# EAGLE board MainBoard 1.3.3 (EAGLE 9.4.1)
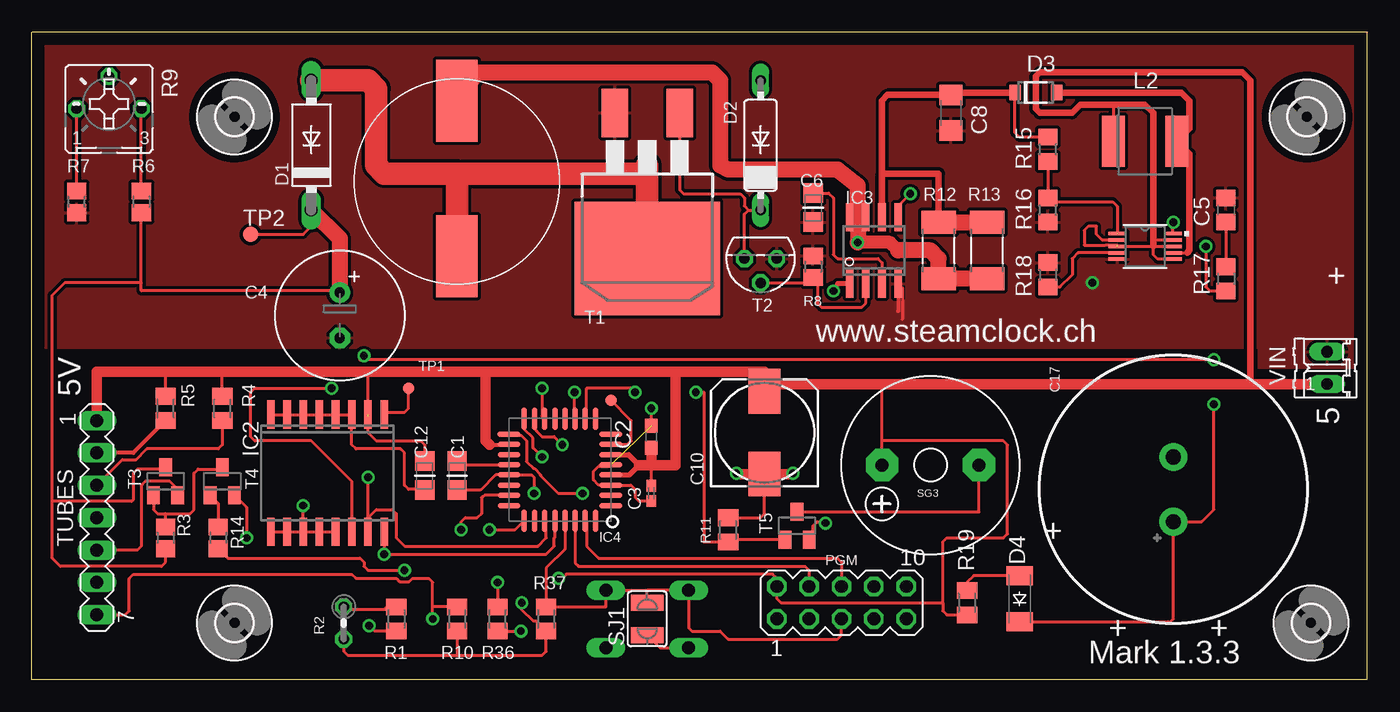
[diagram p0: board, top side]
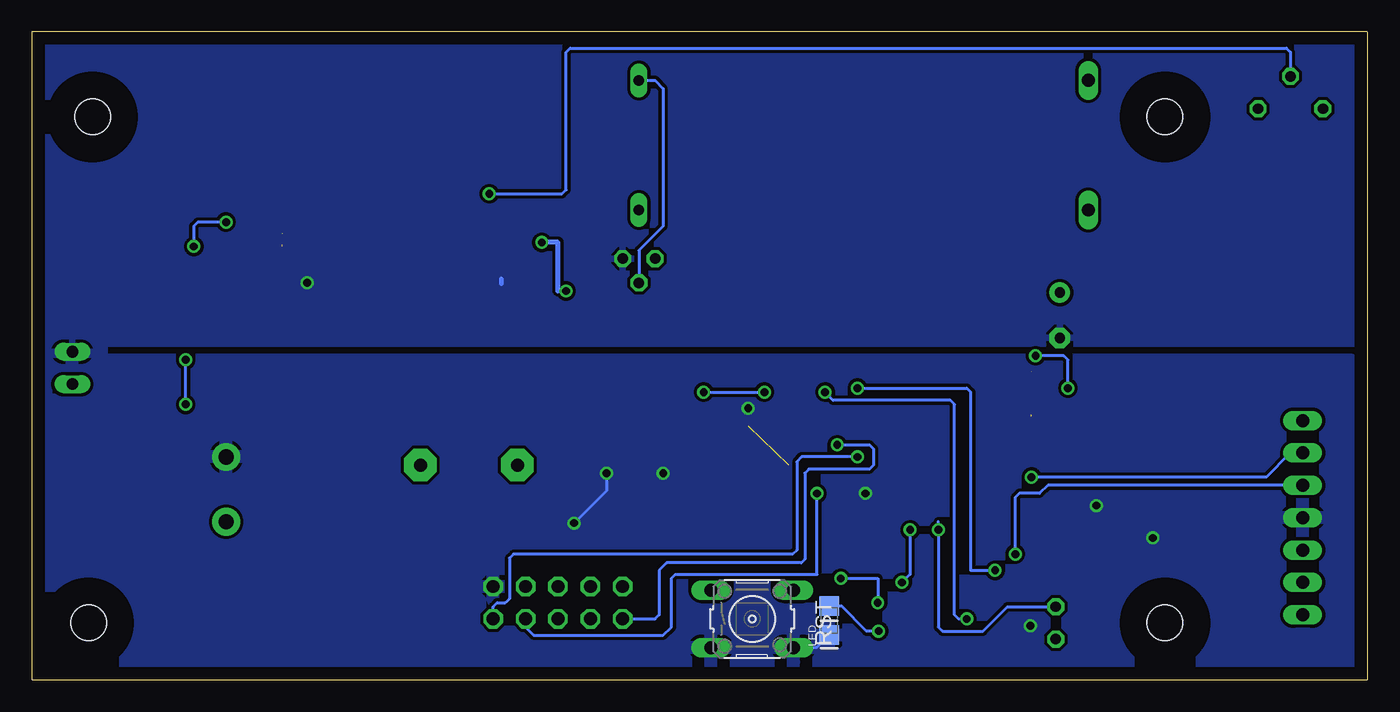
[diagram p1: board, bottom side, seen from below]

Size 104.8 x 50.81 mm. Coordinates in mm from the lower left corner, seen from the top.
Outline: 104.77,0.01 104.77,50.8
Outline: 104.77,0 0.02,0
Outline: 0,0.01 0,50.8
Outline: 0.02,50.81 104.8,50.81
Copper layers (1*16): Top 0.035mm / dielectric 1.5mm / Bottom 0.035mm
Design rules "default": minimum track width 10mil, minimum drill 24mil, track to track 8mil, track to pad 8mil, pad to pad 8mil, via to via 8mil, smd to smd 8mil, copper to edge 40mil, drill to drill 8mil, minimum pad ring 10mil, minimum via ring 8mil, stop-mask expansion 4mil, vias tented up to drill 0mil, thermal gap 10mil
Net classes: 0 default: width 0.254 mm, clearance 0.254 mm; 1 pwr: width 0.254 mm, clearance 0.356 mm

## Footprints (pad centres in the part's own frame; a part is rotated, then mirrored left to right if it is on the bottom)
CAP0805-NP = smd 1.524 x 1.524: 1 0,0; 2 2.286,0
C0603 = smd 1.1 x 1: 1 -0.85,0; 2 0.85,0
C0402K = smd 0.925 x 0.74: 1 -0.6,0; 2 0.6,0
E3,5-10 = drill 0.813 pad 1.6: + -1.778,0 | drill 0.813 pad 1.6 octagon: - 1.778,0
C0805 = smd 1.3 x 1.5: 1 -0.95,0; 2 0.95,0
C1206 = smd 1.6 x 1.8: 1 -1.4,0; 2 1.4,0
153CLV-0810 = smd 3.5 x 2.5: + 3.25,0; - -3.25,0
ELNA21.5X8.0 = drill 1.2 pad 2.184: + -2.54,0; - 2.54,0
F126-10 = drill 1.016 long: A 5.08,0; C -5.08,0
DO07 = drill 0.813 long: A 5.08,0; C -5.08,0
SOD123FL = smd 0.91 x 1.22: A 1.625,0; C -1.625,0
SOD-123_MINI-SMA = smd 1.5 x 2.1: A 1.8,0; C -1.8,0
TP09R = smd 0.9 x 0.9: TP 0,0
2,8 = hole 2.8: 0,0
SO16W = smd 0.6 x 2.2: 1 -4.445,-4.6; 2 -3.175,-4.6; 3 -1.905,-4.6; 4 -0.635,-4.6; 5 0.635,-4.6; 6 1.905,-4.6; 7 3.175,-4.6; 8 4.445,-4.6; 9 4.445,4.6; 10 3.175,4.6; 11 1.905,4.6; 12 0.635,4.6; 13 -0.635,4.6; 14 -1.905,4.6; 15 -3.175,4.6; 16 -4.445,4.6
SOIC8 = smd 0.6 x 2.2: 1 -1.905,-2.6; 2 -0.635,-2.6; 3 0.635,-2.6; 4 1.905,-2.6; 5 1.905,2.6; 6 0.635,2.6; 7 -0.635,2.6; 8 -1.905,2.6
QFP032 = smd 0.432 x 1.778: 1 0,0; 2 0.8,0; 3 1.599,0; 4 2.399,0; 5 3.199,0; 6 3.998,0; 7 4.798,0; 8 5.598,0; 17 5.588,8.001; 18 4.798,7.997; 19 3.998,7.997; 20 3.199,7.997; 21 2.399,7.997; 22 1.599,7.997; 23 0.799,7.997; 24 0,7.997 | smd 1.778 x 0.432: 9 6.807,1.194; 10 6.807,2.007; 11 6.807,2.794; 12 6.807,3.607; 13 6.807,4.394; 14 6.807,5.182; 15 6.807,5.994; 16 6.816,6.803; 25 -1.194,6.807; 26 -1.194,5.994; 27 -1.194,5.182; 28 -1.194,4.394; 29 -1.194,3.607; 30 -1.194,2.794; 31 -1.194,2.007; 32 -1.194,1.194
D0522P = smd 3.251 x 6.452: P$1 0,6.35; P$2 0,-5.842
L5650M = smd 1.8 x 4: 1 -2.5,0; 2 2.5,0
LED0805 = smd 1.524 x 1.524: 1 0,0; 2 2.286,0
MA05-2 = drill 1.016 octagon: 1 -5.08,-1.27; 2 -5.08,1.27; 3 -2.54,-1.27; 4 -2.54,1.27; 5 0,-1.27; 6 0,1.27; 7 2.54,-1.27; 8 2.54,1.27; 9 5.08,-1.27; 10 5.08,1.27
M2012 = smd 1.3 x 1.6: 1 -0.95,0; 2 0.95,0
0204V = drill 0.813 octagon: 1 -1.27,0; 2 1.27,0
R2012 = smd 1.3 x 1.5: 1 -0.85,0; 2 0.85,0
B25P = drill 0.813 octagon: A -2.54,0; E 2.54,0; S 0,2.54
R2010 = smd 1.8 x 2.7: 1 -2.2,0; 2 2.2,0
R0805 = smd 1.3 x 1.5: 1 -0.95,0; 2 0.95,0
B3F-10XX = drill 1.016 long: 1 -3.251,2.261; 2 3.251,2.261; 3 -3.251,-2.261; 4 3.251,-2.261
F/CM12P = drill 1.016 pad 2.54 octagon: + 3.81,0; - -3.81,0
SJW = smd 1.27 x 2.54: 1 -1.27,0; 2 1.27,0
D2PACK = smd 2.083 x 3.81: 1 -2.54,-8.89; 3 2.54,-8.89 | smd 11.43 x 8.89: 2 0,2.54
TO92 = drill 0.813 octagon: 1 1.27,0; 2 0,1.905; 3 -1.27,0
SOT23 = smd 1 x 1.4: 1 -0.95,-1.1; 2 0.95,-1.1; 3 0,1.1
TP12R = smd 1.2 x 1.2: TP 0,0
MA07-1 = drill 1.016 long: 1 -7.62,0; 2 -5.08,0; 3 -2.54,0; 4 0,0; 5 2.54,0; 6 5.08,0; 7 7.62,0
MSOP-10_MS = smd 1.397 x 0.279: 1 -2.184,1.001; 2 -2.184,0.5; 3 -2.184,0; 4 -2.184,-0.5; 5 -2.184,-1.001; 6 2.184,-1.001; 7 2.184,-0.5; 8 2.184,0; 9 2.184,0.5; 10 2.184,1.001
02P = drill 0.914 long: 1 -1.27,0; 2 1.27,0

## Placement (x,y rotation side)
C1  0.1uF  [CAP0805-NP]  33.36,17.16 270 top
C2  10uF  [C0603]  48.6,19.06 90 top
C3  0.1uF  [C0402K]  48.6,14.62 270 top
C4  10uF  [E3,5-10]  24.15,28.59 270 top
C5  10nF  [C0805]  93.68,36.84 90 top
C6  1nF  [CAP0805-NP]  61.3,35.89 90 top
C8  100uF  [C1206]  72.09,44.46 270 top
C10  470uF  [153CLV-0810]  57.49,19.38 90 top
C12  0.1uF  [CAP0805-NP]  30.82,17.16 270 top
C17  [ELNA21.5X8.0]  89.55,14.94 90 top
D1  UF4007  [F126-10]  21.93,41.92 90 top
D2  SB140  [DO07]  57.17,41.92 90 top
D3  SMF5.0AT1  [SOD123FL]  78.76,46.05 0 top
D4  CGRM4001-G  [SOD-123_MINI-SMA]  77.49,6.36 90 top
EXOS  PTR1TP09R  [TP09R]  45.42,21.92 0 top
H3  MOUNT-HOLE2.8  [2,8]  15.89,44.15 0 top
H4  MOUNT-HOLE2.8  [2,8]  15.89,4.46 0 top
H5  MOUNT-HOLE2.8  [2,8]  100.35,4.46 0 top
H6  MOUNT-HOLE2.8  [2,8]  100.03,44.15 0 top
IC2  DS3231/SO  [SO16W]  23.2,16.2 180 top
IC3  MC34063AD  [SOIC8]  66.06,33.67 0 top
IC4  ATMEGA328  [QFP032]  45.42,13.67 90 top
L1  150uH  [D0522P]  33.36,39.07 0 top
L2  10uH  [L5650M]  87.33,42.24 0 top
LED  Blue  [LED0805]  42.25,3.5 90 bottom
PGM  [MA05-2]  63.52,6.04 0 top
R1  10k  [M2012]  28.59,4.78 90 top
R2  15k  [0204V]  24.47,4.46 270 top
R3  100k  [R2012]  10.5,11.12 270 top
R4  1k  [M2012]  14.94,21.28 270 top
R5  1k  [M2012]  10.5,21.28 270 top
R6  680k  [R2012]  8.59,37.48 270 top
R7  4k7  [R2012]  3.51,37.48 90 top
R8  1K  [R2012]  61.3,32.4 270 top
R9  2k  [B25P]  6.05,44.78 0 top
R10  1k  [M2012]  33.36,4.78 90 top
R11  1k  [M2012]  54.63,11.76 270 top
R12  0R2  [R2010]  71.14,33.67 90 top
R13  0R2  [R2010]  74.95,33.67 90 top
R14  47k  [R2012]  14.62,11.12 270 top
R15  909k  [R0805]  79.71,41.61 90 top
R16  107k  [R0805]  79.71,36.84 90 top
R17  2k  [R0805]  93.68,31.45 270 top
R18  13k  [R0805]  79.71,31.76 270 top
R19  4k7  [M2012]  73.36,6.04 90 top
R36  1k  [M2012]  36.53,4.78 270 top
R37  10k  [M2012]  40.34,4.78 90 top
RST  [B3F-10XX]  48.28,4.78 0 bottom
SG3  F/CM12P  [F/CM12P]  70.5,16.84 180 top
SJ1  [SJW]  48.28,4.78 90 top
T1  IRF640N  [D2PACK]  48.28,35.57 180 top
T2  BC516  [TO92]  57.17,33.03 180 top
T3  MMBTA42  [SOT23]  10.5,15.57 0 top
T4  MMBTA42  [SOT23]  14.94,15.57 0 top
T5  BSS123  [SOT23]  60.03,12.08 0 top
TP1  PTR1TP09R  [TP09R]  29.55,22.87 180 top
TP2  TPTP12R  [TP12R]  17.16,34.94 0 top
TUBES  [MA07-1]  5.1,12.71 270 top
U1  LT1618EMSTR  [MSOP-10_MS]  87.33,33.98 0 top
VIN  [02P]  101.62,24.46 90 top

## Library data of the parts
C1 C6 C12 IC4 LED = MySMD
C2 = rcl; MOUSER: 791-0603X106K100CT; SPICEPREFIX: C
C3 = rcl; MOUSER: 963-JMK042BJ104KC-W; SPICEPREFIX: C
C4 C5 C8 R1 R2 R17 R18 = resistor
C10 = rcl; MOUSER: 710-865080253012; SPICEPREFIX: C
C17 = Elkos; MOUSER: 555-DB-5R5D474T
D1 D2 = diode
D3 = diode; MOUSER: 863-MBR0520LT1G
D4 = diode; MOUSER: 863-NSR0320MW2T1G
EXOS TP1 TP2 = testpad
H3-H6 = holes
IC2 = DS3231; AVAILABILITY: Unavailable; MF: Maxim Integrated; MP: DS3231; PACKAGE: SOIC-16 Maxim Integrated; PRICE: None
IC3 = mc34063
L1 = inductor-coilcraft
L2 = rcl; MOUSER: 851-CR43NP-100MC; SPICEPREFIX: L
PGM TUBES = con-lstb; OC_FARNELL: unknown; OC_NEWARK: unknown
R3-R8 R10-R14 R19 R36 R37 = adafruit
R9 = pot
R15 = resistor; MOUSER: 754-RR1220P-9093D-M
R16 = resistor; MOUSER: RR0816P-1073-D-04D
RST = switch-omron; MPN: B3F-1000; OC_FARNELL: 176432; OC_NEWARK: 36M3542
SG3 = buzzer; OC_FARNELL: unknown; OC_NEWARK: unknown
SJ1 = jumper
T1 = transistor-power
T2 = transistor-pnp
T3 T4 = transistor
T5 = transistor-small-signal
U1 = LT1618EMSTR; AVAILABILITY: Unavailable; DESCRIPTION: LT1618 - Constant-Current/Constant-Voltage 1.4MHz Step-Up DC/DC Converter; MF: Linear Technology; MOUSER: 584-LT1618EMS#PBF; MP: LT1618EMS#TR; PACKAGE: MSOP-10 Linear Technology; PRICE: None
VIN = con-amp-quick; OC_FARNELL: unknown; OC_NEWARK: unknown

## Nets
+5V [pwr]: C2.1 C3.1 C10.+ C12.1 IC2.2 IC4.4 IC4.6 IC4.18 L2.1 PGM.2 R2.2 R4.1 R5.1 R10.1 R19.1 R37.1 SG3.+ TUBES.1 U1.2 U1.3 U1.6 U1.8 U1.9 VIN.1
AREF: C1.1 IC4.20
BATT: C17.+ D4.C IC2.14
BUZ: IC4.10 R11.2 T5.1
COM: C12.2 IC2.3 IC2.4 IC2.5 IC2.6 IC2.7 IC2.8
GND: C1.2 C2.2 C3.2 C4.- C5.2 C6.1 C8.2 C10.- C17.- IC2.9 IC2.10 IC2.11 IC2.12 IC2.13 IC3.4 IC4.3 IC4.5 IC4.21 LED.1 PGM.10 R1.1 R7.1 R8.1 R11.1 R16.1 R18.1 RST.3 RST.4 SJ1.1 T1.3 T2.3 T4.2 T5.2 TUBES.4 U1.5 VIN.2
HT: T3.2 TUBES.5
IRQ: IC4.11 R10.2 TUBES.7
LDR: IC4.23 R1.2 R2.1
LED: IC4.25 R36.1
MISO: IC4.16 PGM.9
MOSI: IC4.15 PGM.1
N$1: IC2.1 TP1.TP
N$2: D1.A L1.P$2 T1.2
N$3: SG3.- T5.3
N$5: EXOS.TP IC4.7
N$6: C6.2 IC3.3
N$7: R3.1 T3.1 T4.3
N$9: R7.2 R9.A
N$10: D2.A IC3.2 R8.2 T2.2
N$11: R6.1 R9.E
N$12: D3.A L2.2 U1.7
N$14: R18.2 U1.4
N$15: LED.2 R36.2
N$16: IC3.5 R9.S
N$17: IC3.1 IC3.7 IC3.8 L1.P$1 R12.1 R13.1
N$18: R17.2 U1.10
N$19: R14.1 T4.1
N$21: D2.C T1.1 T2.1
N$22: C5.1 R17.1
N$23: D4.A R19.2
N$24: R15.1 R16.2 U1.1
PWM: IC4.14 R14.2
PWR [pwr]: C8.1 D3.C IC3.6 R12.2 R13.2 R15.2
RAW_HT: C4.+ D1.C R3.2 R6.2 T3.3 TP2.TP
RESET: IC4.29 PGM.5 R37.2 RST.1 RST.2 SJ1.2
RX: IC4.30 PGM.4
SCK: IC4.17 PGM.7
SCL: IC2.16 IC4.28 R4.2 TUBES.3
SDA: IC2.15 IC4.27 R5.2 TUBES.2
TEMP: IC4.8
TX: IC4.31 PGM.6
VFD_CK: IC4.9
VFD_DATA: IC4.12
VFD_LOAD: IC4.13

## Tracks (layer width: path | path; a pad name or v marks a point on that pad's centre or on a via)
+5V  (via drill 0.61)  (3 unrouted)
  Top 0.254: 37.39,18.43 IC4.18 | 26.37,20.01 26.37,20.65 26.37,19.38 27.01,18.74 30.5,18.74 30.82,18.43 C12.1 | C10.+ 57.49,23.19 57.49,24.14 | SG3.+ 66.69,18.74 | 66.69,18.74 66.69,23.19 | R5.1 10.5,24.14 | R4.1 14.94,24.14 | 33.36,1.92 24.79,1.92 24.47,2.23 R2.2 | 33.36,1.92 40.03,1.92 40.34,2.23 R37.1 39.58,4.59 39.34,4.59 38.44,5.5 v38.44,6.05 | R10.1 33.36,1.92 | 66.69,18.74 76.22,18.74 76.54,18.43 76.54,11.44 76.22,11.12 71.77,11.12 71.46,10.81 71.46,6.05 | 71.46,6.05 71.46,5.41 71.77,5.09 71.78,5.09 R19.1 | 71.46,6.05 58.76,6.05 58.44,6.36 PGM.2 58.44,7.95 58.11,8.28 41.94,8.28 41.61,7.95 v41.33,7.95 | IC2.2 26.37,24.14 | U1.3 87.97,33.98 | 87.97,33.98 U1.8 | U1.6 88.33,32.98 87.97,33.35 87.97,33.98 | C3.1 48.6,16.84 | U1.9 88.1,34.49 87.97,34.62 | 84.79,45.1 84.83,45.06 L2.1 | U1.2 83.97,34.49 83.52,34.94 83.52,35.57 82.89,35.57 82.57,35.26 82.57,34.09 84.24,34.09 84.25,34.11 85.15,34.11
  Top 0.305: 45.14,17.63 IC4.6 | 10.5,22.55 R5.1 | 35.9,18.43 37.39,18.43
  Top 0.406: IC4.6 46.82,17.66 47.65,16.84 46.87,16.06 IC4.4
  Top 0.508: 95.59,23.19 95.59,47 94.95,47.64 79.08,47.64 78.76,47.32 78.76,44.78 79.08,44.46 81.62,44.46 82.25,45.1 84.79,45.1 87.33,45.1 87.97,44.46 87.97,34.62 87.97,33.98
  Top 0.813: 14.94,24.14 10.5,24.14 5.1,24.14 TUBES.1 | 14.94,24.14 26.37,24.14 | 26.37,24.14 35.58,24.14 | VIN.1 95.59,23.19 66.69,23.19 57.49,23.19 | 57.49,24.14 50.5,24.14 | 50.5,24.14 35.58,24.14 | 47.65,16.84 48.6,16.84 | 48.6,16.84 50.5,16.84 50.5,24.14 | 35.58,24.14 35.58,18.74 35.9,18.43 | 48.6,16.84 C2.1
  Bottom 0.254: v41.33,7.95 38.44,7.95 v38.44,6.05
AREF
  Top 0.254: C1.1 33.36,16.84 37.4,16.84
  Top 0.305: 37.4,16.84 IC4.20
BATT  (via drill 0.61)
  Top 0.254: v92.73,21.6 92.73,13.35 91.78,12.4 C17.+ 89.55,4.78 89.24,4.46 89.13,4.56 D4.C | v26.05,25.41 25.74,25.1 v92.73,25.1 | v23.52,22.87 17.48,22.87 17.16,22.55 17.16,19.06 17.48,18.74 21.93,18.74 25.1,15.57 IC2.14
  Bottom 0.254: v92.73,21.6 v92.73,25.1 | v23.52,22.87 23.52,25.1 23.83,25.41 v26.05,25.41
BUZ  (via drill 0.61)
  Top 0.254: T5.1 54.8,10.98 R11.2 52.73,10.81 52.73,22.55 v52.09,22.55 | IC4.10 43.52,20.57 43.52,22.87 47.01,22.87 v47.33,22.55
  Bottom 0.254: v52.09,22.55 v47.33,22.55
COM
  Top 0.254: IC2.8 IC2.7 IC2.6 IC2.5 IC2.4 IC2.3 25.1,18.43 25.42,18.11 28.91,18.11 29.23,17.79 29.23,15.25 29.55,14.94 30.75,14.94 C12.2
GND  (via drill 0.61)  (1 unrouted)
  Top 0.254: IC2.9 IC2.10 IC2.11 | IC2.11 IC2.12 IC2.13 | IC2.11 v21.29,13.67 | IC4.21 37.94,16.06 | 33.04,15.19 C1.2 35.2,14.87 36.39,16.06 IC4.21 | IC4.21 39.21,16.06 39.39,15.89 v39.39,14.62 | v83.2,31.13 83.29,31.13 | T4.2 16.85,13.51 v16.85,11.12 | 60.81,10.81 T5.2 61.3,11.3 61.3,12.08 61.62,12.4 62.25,12.4 v62.25,12.29 | R1.1 26.88,3.82 v26.47,4.23 | SJ1.1 49.27,2.51 RST.3 | R11.1 57.17,12.71 57.49,13.03 C10.- | 45.4,16.84 45.4,16.82 45.35,16.76 44.46,16.76 44.05,16.35 44.05,15.67 44.46,15.26 IC4.3 47,15.26 47.33,14.94 47.33,14.3 47.65,13.98 48.56,13.98 C3.2 | C2.2 v48.6,21.28 | IC3.4 68.28,30.75 68.28,28.27
  Top 0.305: 45.4,16.84 IC4.5 | IC3.4 67.96,28.9
  Top 0.813: C10.- 57.88,16.52 57.49,16.52 | C10.- 59.64,16.13 v59.71,16.21 | C10.- 55.34,16.13 v55.27,16.21
  Bottom 0.254: 62.25,12.4 v62.25,12.29 59.71,14.83 v59.71,16.21 | LED.1 43.24,2.51 RST.4
  Bottom 0.406: 67.96,31.44 IC3.4
  pour Bottom: 1.29,25.09 0.93,-9.7 17.78,-11.94 113.35,-10.34 112.97,25.09
  pour Top: -1.89,53.67 -1.89,26.05 109.56,26.05 109.56,53.67
  pour Top: 105.43,27.32 96.22,27.32 96.22,24.46 105.43,24.46
  pour Bottom: 108.29,26.37 -3.47,26.37 -3.47,53.04 108.29,53.04
  pour Bottom: 106.06,27.63 106.06,22.55 99.08,22.55 99.08,27.63
HT
  Top 0.254: T3.2 11.45,14.94 10.81,15.57 8.91,15.57 8.67,15.33 8.59,15.25 8.59,10.49 8.28,10.17 TUBES.5
IRQ  (via drill 0.61)
  Top 0.254: IC4.11 42.57,20.54 v42.57,22.55 | TUBES.7 7.32,5.09 7.64,5.41 7.64,7.95 7.96,8.27 25.1,8.27 25.42,7.95 28.61,7.95 28.86,7.7 29.6,7.7 29.85,7.95 31.13,7.95 31.45,7.63 31.45,5.73 | R10.2 31.45,5.72 31.45,5.73 | v31.45,4.78 31.45,5.73
  Bottom 0.254: v31.45,4.78 32.09,4.78 32.41,5.09 32.41,21.6 32.72,21.92 41.93,21.92 v42.57,22.55
LDR  (via drill 0.61)
  Top 0.254: IC4.23 35.51,14.46 35.41,14.36 35.33,14.36 35.26,14.3 35.26,13.03 34.95,12.71 33.99,12.71 33.68,12.4 v33.68,11.76 | 28.28,6.04 R1.2 27.83,5.72 27.64,5.54 | R2.1 24.66,5.54 27.64,5.54 | 27.64,5.54 28.59,5.54
  Bottom 0.254: R2.1 28.28,5.73 30.18,3.82 33.36,3.82 33.68,4.14 v33.68,11.76 33.68,12.4
LED  (via drill 0.61)
  Top 0.254: v36.53,7.63 R36.1 | v35.9,11.76 37.9,11.76 IC4.25
  Bottom 0.254: v36.53,7.63 35.9,8.27 v35.9,11.76
MISO  (via drill 0.61)
  Top 0.254: v40.03,17.47 39.3,18.19 39.3,18.96 38.62,19.65 IC4.16
  Bottom 0.254: v40.03,17.47 44.41,17.47 44.79,17.09 44.79,10.17 45.11,9.85 67.01,9.85 67.33,9.54 67.33,6.36 67.65,6.05 68.28,6.05 68.6,5.73 PGM.9
MOSI  (via drill 0.61)
  Top 0.254: IC4.15 39.43,19.67 39.58,19.52 39.58,19.51 40.03,19.06 40.98,19.06 v41.61,18.43
  Bottom 0.254: PGM.1 55.9,4.78 55.58,5.09 55.58,8.58 54.99,9.18 44.43,9.18 44.15,9.45 44.15,16.21 43.84,16.52 39.07,16.52 38.76,16.84 38.76,18.11 39.07,18.43 v41.61,18.43
N$1
  Top 0.254: IC2.1 27.8,20.97 29.23,20.97 29.55,21.28 TP1.TP
N$2
  Top 1.778: L1.P$2 33.36,39.7 | 33.36,39.7 27.64,39.7 27.01,40.33 27.01,46.37 26.37,47 D1.A | 33.36,39.7 47.96,39.7 48.28,40.33 T1.2
N$3
  Top 0.254: T5.3 74.31,13.18 SG3.-
N$5
  Top 0.254: IC4.7 46.73,18.46 47.01,18.74 47.01,20.33 EXOS.TP
N$6
  Top 0.254: C6.2 62.5,38.18 62.89,37.8 62.89,33.35 63.2,33.03 66.38,33.03 66.69,32.72 IC3.3
N$7
  Top 0.254: T4.3 14.94,16.52 13.04,16.52 12.72,16.21 12.72,13.35 12.4,13.03 10.5,13.03 | T3.1 9.55,13.35 9.86,13.03 10.5,13.03 | R3.1 10.5,13.03
N$9
  Top 0.254: R7.2 R9.A
N$10
  Top 0.254: T2.2 60.88,31.13 R8.2 61.62,31.23 61.62,29.54 61.93,29.22 65.11,29.22 65.42,29.54 IC3.2
  Bottom 0.254: D2.A 55.9,47 55.27,46.37 55.27,35.57 57.17,33.67 T2.2
N$11
  Top 0.254: R6.1 R9.E
N$12
  Top 0.254: D3.A 80.52,45.91 | 90.83,33.67 90.64,33.48 U1.7
  Top 0.508: 90.67,33.51 90.83,33.67 90.83,41.25 L2.2 90.83,43.23 90.83,45.41 90.19,46.05 80.52,46.05 80.52,45.91
N$14
  Top 0.254: 80.03,30.49 R18.2 80.67,30.81 81.62,31.76 81.62,33.03 82.07,33.48 U1.4
N$15  (via drill 0.61)
  Top 0.254: R36.2 v38.36,3.82
  Bottom 0.254: LED.2 41.3,5.79 39.33,3.82 v38.36,3.82
N$16  (via drill 0.6)
  Top 0.254: IC3.5 67.96,37.16 v68.92,38.11
  Bottom 0.254: v68.92,38.11 63.2,38.11 62.89,38.43 62.89,49.22 62.57,49.54 6.37,49.54 6.05,49.22 R9.S
N$17  (via drill 0.6)
  Top 0.254: IC3.8 IC3.7 64.79,35.63 64.79,35.57
  Top 0.406: IC3.1 63.2,31.07 v62.89,30.49
  Top 0.61: IC3.8 64.79,36.52
  Top 1.016: 64.79,36.52 64.79,37.48 | 67.96,33.67 67.33,34.3 v64.79,34.3
  Top 1.27: 64.79,37.48 64.79,38.75 63.2,40.02 54.63,40.02 54,40.33 54,47 53.36,47.64 34.95,47.64 L1.P$1 | 67.96,33.67 70.5,33.67 71.14,33.03 R12.1 R13.1 | 64.79,35.57 v64.79,34.3
  Bottom 0.406: v62.89,30.49 63.52,30.49 63.52,34.3 v64.79,34.3
N$18  (via drill 0.61)
  Top 0.254: U1.10 89.52,35.85 v89.55,35.89 | v92.09,33.98 92.09,30.81 92.41,30.49 R17.2
  Bottom 0.254: v89.55,35.89 91.78,35.89 92.09,35.57 v92.09,33.98
N$19
  Top 0.254: T4.1 14.62,13.84 R14.1
N$21
  Top 0.254: T2.1 55.9,36.52 56.22,36.84 | 56.22,36.84 D2.C | T1.1 50.82,38.43 51.14,38.11 55.58,38.11 55.9,37.8 55.9,37.16 56.22,36.84
N$22
  Top 0.254: C5.1 R17.1
N$23
  Top 0.254: D4.A 73.89,8.16 73.36,7.63 R19.2
N$24  (1 unrouted)
  Top 0.254: R15.1 R16.2 80.03,37.48 84.79,37.48 85.15,37.12 85.15,35.01
PWM  (via drill 0.61)
  Top 0.254: v40.03,22.87 40.03,20.69 IC4.14 | R14.2 15.36,9.54 25.74,9.54 26.05,9.22 26.05,8.9 26.37,8.58 v29.23,8.58
  Bottom 0.254: v29.23,8.58 31.13,8.58 31.13,22.55 31.45,22.87 v40.03,22.87
PWR
  Top 0.254: R15.2 77.49,42.55 77.13,42.91 D3.C
  Top 0.508: IC3.6 66.69,39.7 | D3.C 72.09,46.05 C8.1 67.13,45.86 66.69,45.42 66.69,39.7 | 66.69,39.7 71.14,39.7 R12.2
  Top 1.27: 71.14,35.89 R12.2 R13.2
RAW_HT
  Top 0.254: C4.+ 24.13,30.49 8.59,30.49 8.59,31.13 | 8.59,31.13 R6.2 | 8.59,31.13 2.56,31.13 1.61,30.18 1.61,13.98 | 1.61,13.98 7.81,13.98 7.96,14.13 7.96,16.21 8.28,16.52 10.35,16.52 T3.3 | R3.2 10.5,9.22 10.18,8.9 2.24,8.9 1.61,9.54 1.61,13.98 | TP2.TP 21.29,34.94 21.93,35.57 D1.C
  Top 1.27: D1.C 24.15,34.62 C4.+
RESET
  Top 0.254: IC4.29 41.82,10.25 40.34,8.78 R37.2 45.03,5.72 RST.2 48.28,7.04 | PGM.5 63.52,3.5 63.2,3.19 54.63,3.19 54,3.82 51.77,3.82 51.53,4.06 RST.1 48.28,7.04 | SJ1.2 48.28,7.04
RX
  Top 0.254: IC4.30 42.63,9.16 42.88,8.9 60.66,8.9 60.98,8.58 PGM.4
SCK  (via drill 0.61)
  Top 0.254: IC4.17 37.51,19.16 38.39,19.16 38.8,18.75 38.8,17.12 39.34,16.57 39.42,16.57 39.9,16.1 39.9,16.01 41.3,14.62 v43.2,14.62
  Bottom 0.254: v43.2,14.62 43.2,8.27 54.31,8.27 54.63,7.95 54.63,4.14 55.27,3.5 65.42,3.5 66.06,4.14 PGM.7
SCL  (via drill 0.61)
  Top 0.254: TUBES.3 7.11,17.26 8.18,17.26 9.03,18.11 14.62,18.11 14.94,18.43 R4.2 | IC2.16 v27.64,9.85 40.34,9.85 40.98,10.49 40.98,11.12 41.03,11.18 IC4.28
  Bottom 0.254: TUBES.3 25.1,15.25 25.74,14.62 27.32,14.62 27.64,14.3 v27.64,9.85
SDA  (via drill 0.61)
  Top 0.254: IC4.27 40.34,12.37 40.34,11.12 39.71,10.49 29.23,10.49 28.59,11.12 28.59,13.03 28.28,13.35 27.01,13.35 26.37,12.71 IC2.15 v26.37,15.89
  Top 0.305: R5.2 7.95,17.79 TUBES.2
  Bottom 0.254: TUBES.2 6.05,17.79 7.96,15.89 v26.37,15.89
TX
  Top 0.254: IC4.31 43.52,12.37 43.52,10.49 44.47,9.54 63.2,9.54 63.52,9.22 PGM.6

## Text on the board
tNames: + | www.steamclock.ch | 5V | 5 | + | + | + | Mark 1.3.3